# Altium PCB AAI.PcbDoc
Units mm, origin at the board's own origin, x right, y up, seen from the top; angles counter-clockwise.
Board outline 62.23 x 31.75 mm, 2 copper layers (Top Layer, Bottom Layer); 15 components, 10 nets, 33 pads, 7 vias.
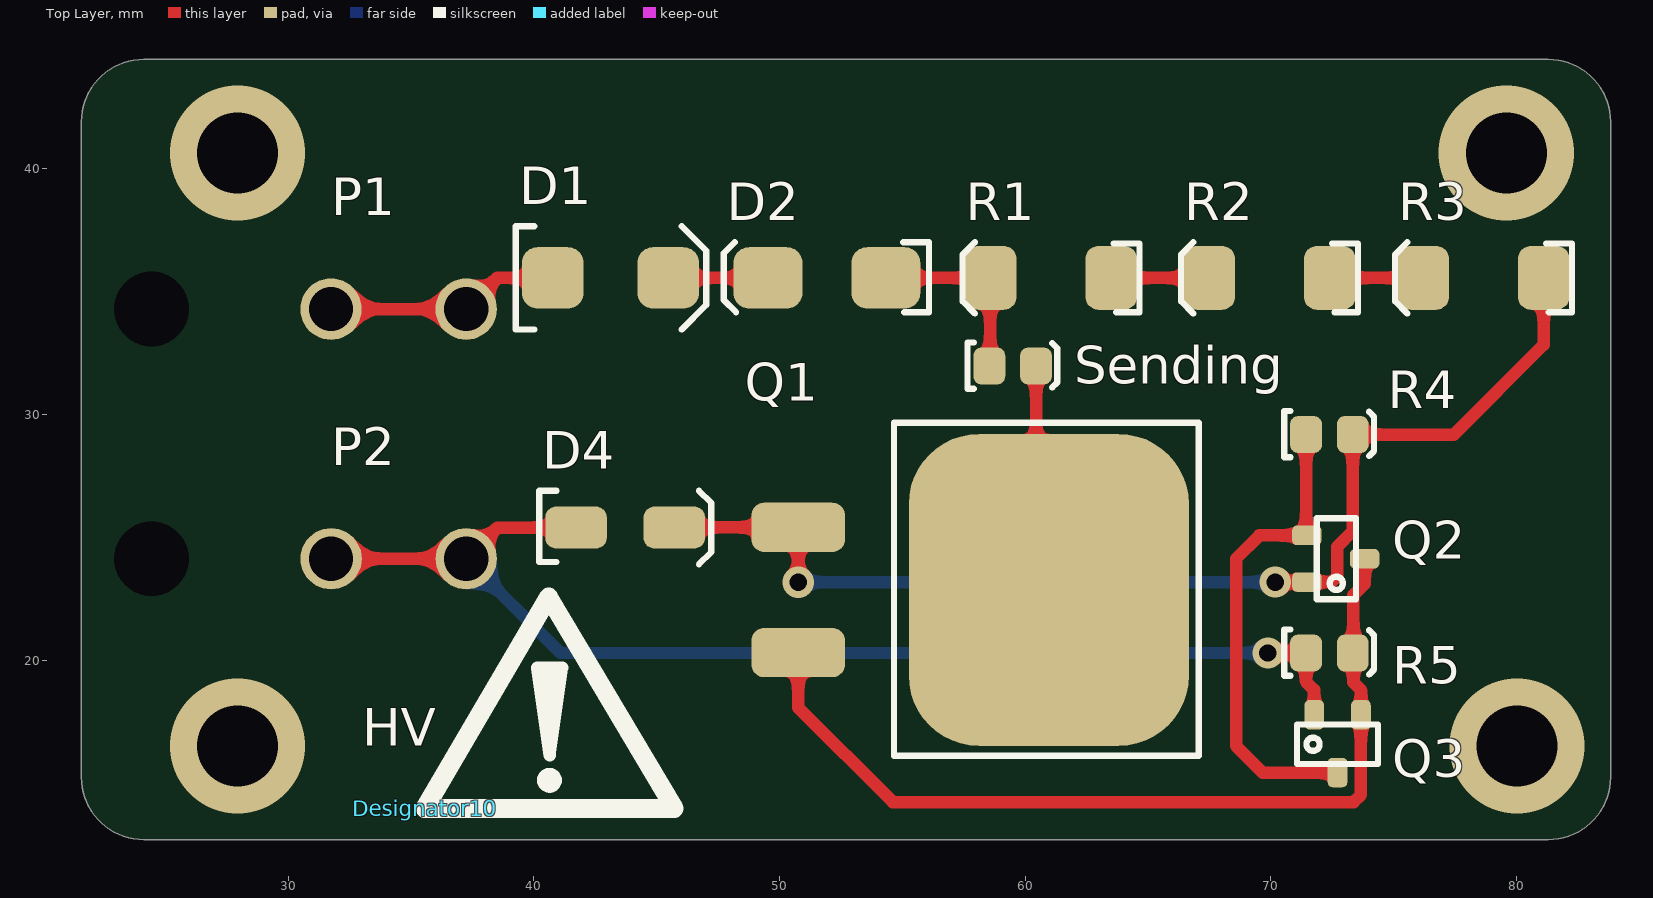
[diagram p0: Top Layer view]
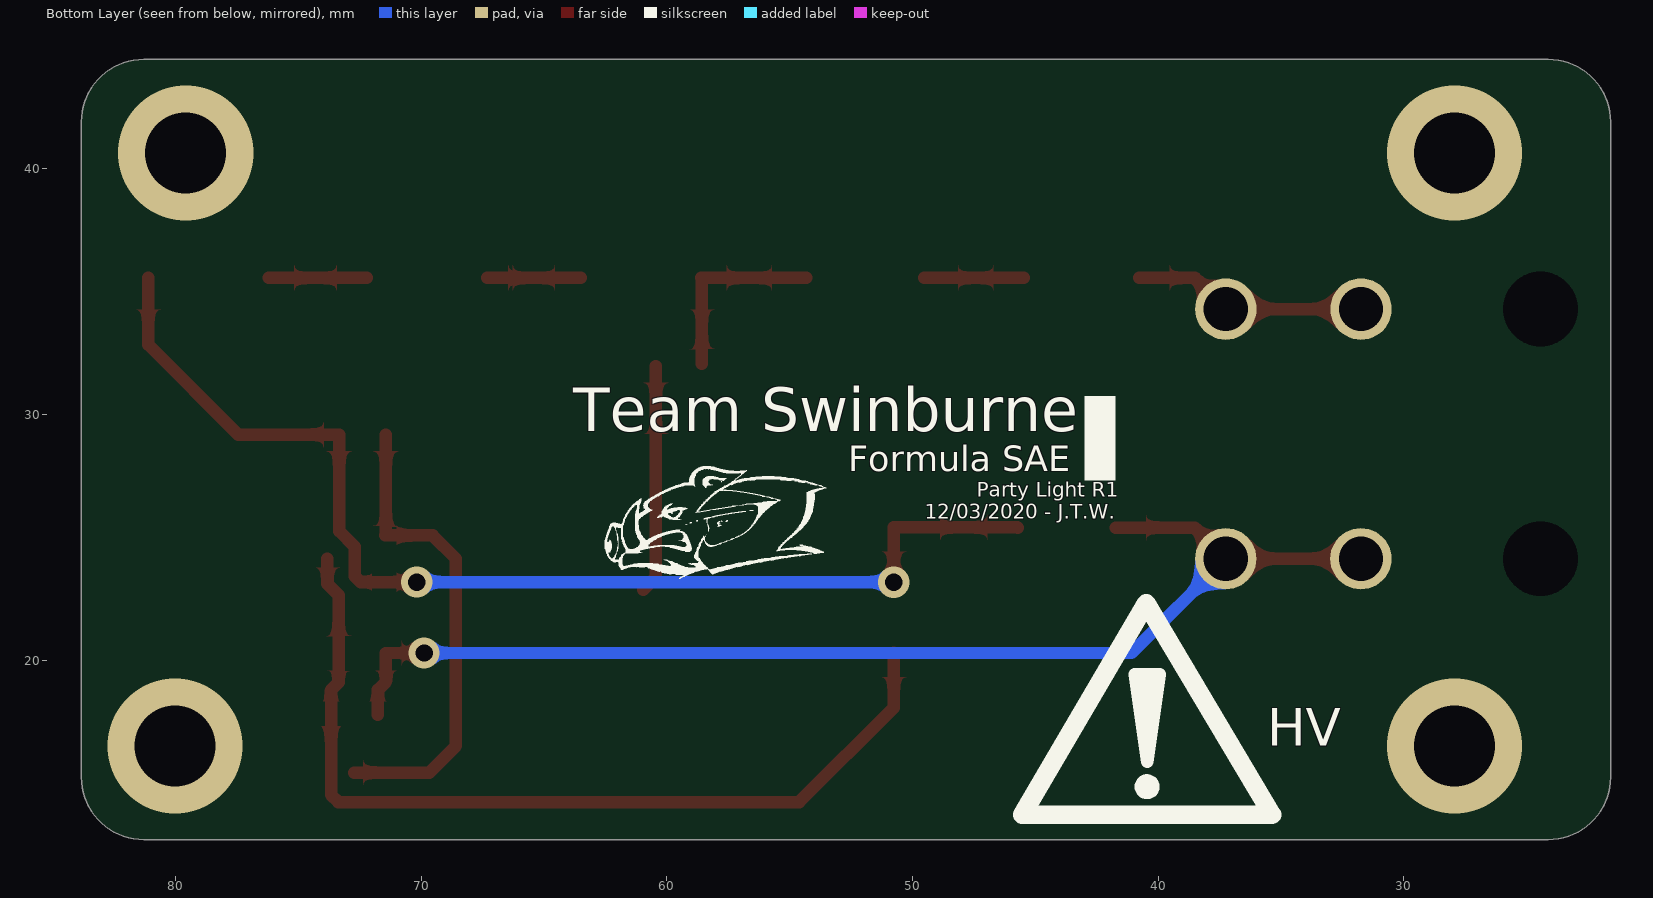
[diagram p1: Bottom Layer view, seen from below]
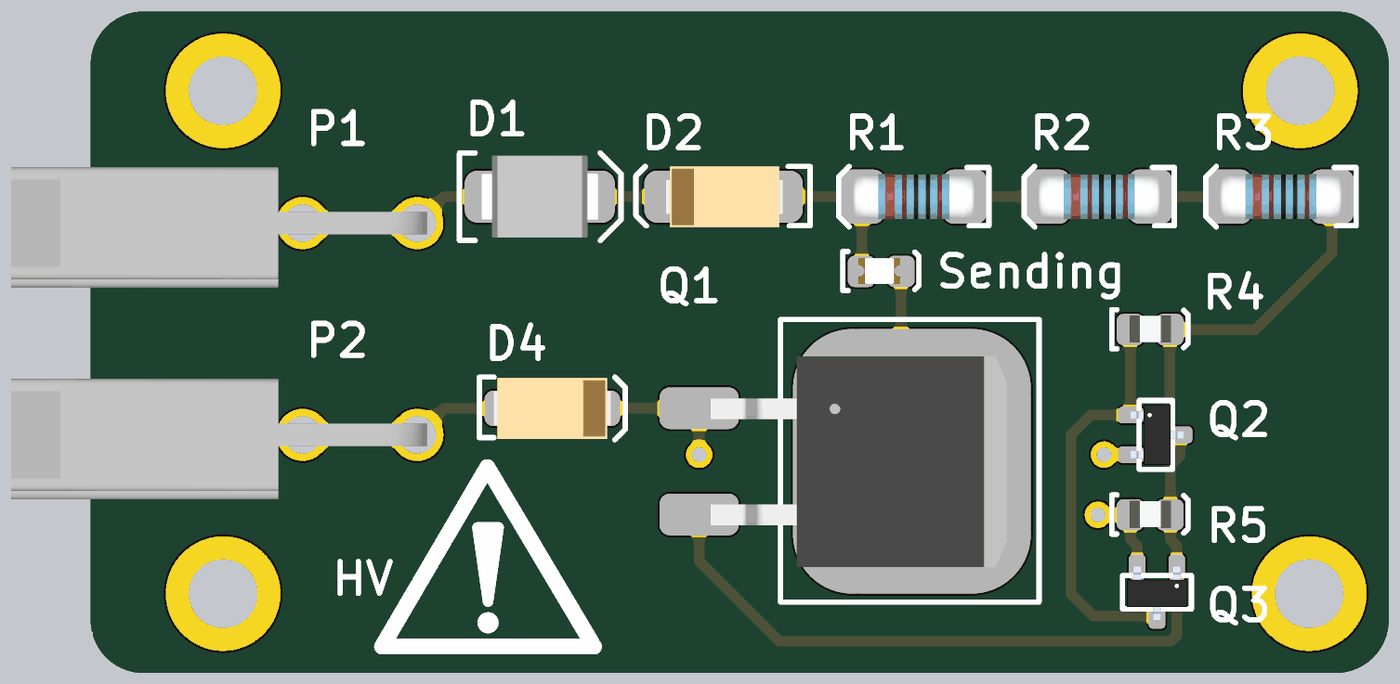
[diagram p2: 3D render of the assembled board from above, using the file's embedded part models]

## Layer stack, top to bottom
Top Solder: solder mask 0.025, SM-004, Dk 4
Top Layer: signal copper 0.0356
Dielectric 1: dielectric 0.32, FR-4, Dk 4.8
Bottom Layer: signal copper 0.0356
Bottom Solder: solder mask 0.025, SM-004, Dk 4

## Board outline
21.59,15.24 21.59,41.91 cw(c24.13,41.91) 24.13,44.45 81.28,44.45 cw(c81.28,41.91) 83.82,41.91 83.82,15.24 cw(c81.28,15.24) 81.28,12.7 24.13,12.7 cw(c24.13,15.24)

## Design rules (kind name [scope] priority, off if disabled: settings)
Clearance [All] p1: gap=0.254 ignorepadtopadclearanceinfootprint=FALSE except(0: Arc-Hole Track-Hole SMDPad-Hole THPad-Hole Via-Hole Fill-Hole Poly-Hole Region-Hole Text-Hole)
PolygonConnect [All] p1: connectstyle=Relief reliefconductorwidth=0.254 reliefentries=4 polygonreliefangle="90 Angle" airgapwidth=0.254
RoutingVias [All] p1: holewidth=0.711 width=1.27 viastyle="Through Hole" minholewidth=0.711 minwidth=1.27 maxholewidth=0.711 maxwidth=1.27
SolderMaskExpansion [All] p1: expansion=0.102 istentingtop=FALSE
Width [All] p1: maxlimit=1.27 minlimit=0.254 preferedwidth=0.635 minimp=50.000000 maximp=50.000000 favimp=50.000000
30 further rules are at their usual default settings.

## Components (designator, comment, footprint, x,y, rotation, side; value= is the part's Value field where it differs from the comment)
D1 "SD560BTR" "SMB Diode" 41.02,35.56 r0 top
D2 "1SMB5942B-13" "DI SMB Diode" 54.08,35.56 r180 top
D4 "SMAZ5V6-13-F" "DI SMA Diode" 41.72,25.4 r0 top
Designator10 "Comment" "~HV Silk" 35.56,13.97 r0 top
P1 "39301022" 39301022 37.247,34.29 r270 top
P2 "39301022" 39301022 37.25,24.13 r270 top
Q1 "R6015ENJTL" "R TO-263 N-MOSFET" 60.96,22.86 r270 top
Q2 "BC858ALT1G" "ON TO-236-3 BJT" 73.66,24.13 r90 top
Q3 "BC848ALT1G" "ON TO-236-3 BJT" 72.71,15.58 r0 top
R1 "330K" "VB 0207" 63.5,35.56 r180 top
R2 "330K" "VB 0207" 72.39,35.56 r180 top
R3 "330K" "VB 0207" 81.1,35.56 r180 top
R4 "10k" 0805 72.39,29.21 r0 top
R5 "240R" 0805 72.39,20.32 r0 top
Sending "Red" "0805 LED" 59.5,32 r0 top (schematic designator D3)

## Footprints (in the part's own frame and the unit in brackets; to place one, negate y for a bottom-side part, rotate by r counter-clockwise, add the part's x,y. Pads: shape width x height; smd on the part's side, far side on the other; paste and mask are expansions set on the pad)
0805 [mm]
  rrect50% 1.3x1.5 smd: 1(-0.962,-0.026) 2(0.938,-0.026)
  silkscreen extent -1.85,-0.95 1.8,0.93, body extent -1,-0.65 1,0.66, height 0.73
"0805 LED" [mm]
  rrect50% 1.3x1.5 smd: A(-0.962,-0.026) K(0.938,-0.026)
  silkscreen extent -1.85,-0.95 1.8,0.93, body extent -1.1,-0.62 0.9,0.62, height 1
39301022 [mm]
  round 2.5 hole 1.8: 1(0,-5.5) 2(0,0)
  round 1.524 hole 3.05: ""(0,-12.8)
  body extent -2.7,-19.47 3.1,0.47, height 11.4
"DI SMA Diode" [mm]
  rrect50% 2.5x1.7 smd: A(0,0) K(4,0)
  silkscreen extent -1.5,-1.5 5.5,1.5, body extent -0.8,-1.46 4.79,1.46, height 2.35
"DI SMB Diode" [mm]
  rrect50% 2.8x2.5 smd: A(-0.25,0) K(4.55,0)
  silkscreen extent -2,-1.45 6.35,1.4, body extent -0.69,-1.45 4.89,1.47, height 2.35
"ON TO-236-3 BJT" [mm]
  rrect50% 0.8x1.2 smd: B(0.95,2.2) C(0,-0.15) E(-0.95,2.2)
  silkscreen extent -1.65,0.2 1.65,1.8, body extent -1.45,-0.35 1.45,2.25, height 1
"R TO-263 N-MOSFET" [mm]
  rrect50% 12.7x11.4 smd: D(0,0)
  rrect50% 2x3.8 smd: G(-2.55,-10.2) S(2.55,-10.2)
  silkscreen extent -6.8,-6.3 6.75,6.1, body extent -5.03,-9.64 5.08,4.56, height 4.7
"SMB Diode" [mm]
  rrect50% 2.5x2.5 smd: A(-0.25,0) K(4.45,0)
  silkscreen extent -1.75,-2.1 6,2.1, body extent -0.69,-1.97 4.9,1.97, height 2.5
"VB 0207" [mm]
  rrect50% 2.1x2.6 smd: 1(0,0) 2(4.9,0)
  silkscreen extent -1.15,-1.45 6.05,1.45, body extent -0.45,-1.1 5.35,1.1, height 2.19
"~HV Silk" [mm] "HV Symbol Silkscreen overlay"
  silkscreen extent 0,0 10.16,8.61

## Part data
D1: "1.2V_F 600V 5A SMB", Digikey Part Number=1655-1530-2-ND, Manufacturer="SMC Diode Solutions", Digikey Link=https://www.digikey.com/product-detail/en/smc-diode-solutions/SD560BTR/1655-1530-2-ND/6022620, Part Number=SD560BTR
D2: "DIODE ZENER 51V 3W SMB", Digikey Part Number=1SMB5942B-13DICT-ND, Manufacturer="Diodes Inc", Digikey Link=https://www.digikey.com/product-detail/en/diodes-incorporated/1SMB5942B-13/1SMB5942B-13DICT-ND/5054245, Part Number=1SMB5942B-13
D4: "DIODE ZENER 5.6V 1W SMA", Digikey Part Number=SMAZ5V6-FDICT-ND, Manufacturer="Diodes Inc", Digikey Link=https://www.digikey.com/product-detail/en/diodes-incorporated/SMAZ5V6-13-F/SMAZ5V6-FDICT-ND/755500, Part Number=SMAZ5V6-13-F
P1 P2: Digikey Part Number=WM21363-ND, Angle=90, Contact=Gold, Digikey Link=https://www.digikey.com/product-detail/en/molex/0039301022/WM21363-ND/930332, Flange=No, Part Number=39301022, Pitch=4.20mm, Positions=2, Row Spacing=4.2mm
Q1: "MOSFET N-CH 600V 15A LPT", Digikey Part Number=R6015ENJTLCT-ND, Manufacturer="Rohm Semiconductor", Digikey Link=https://www.digikey.com.au/product-detail/en/rohm-semiconductor/R6015ENJTL/R6015ENJTLCT-ND/5042516, LatestRevisionDate=29-May-2009, LatestRevisionNote="IPC-7351 Footprint Added.", PackageDescription="4-Pin SOT-343 Package 1.3 mm Pitch, 2.1 mm Lead Span", PackageReference=SOT-343, PackageVersion=Sep-2000, Part Number=R6015ENJTL, Published=24-Mar-1999, Publisher="Altium Limited"
Q2: "TRANS PNP 30V 0.1A SOT-23", Digikey Part Number=BC858ALT1GOSCT-ND, Manufacturer="ON Semiconductor", Digikey Link=https://www.digikey.com.au/product-detail/en/on-semiconductor/BC858ALT1G/BC858ALT1GOSCT-ND/3462248?fbclid=IwAR0XE0JmsZu1bfxkpmh7_fMKeVVYT41RbargOB6Kv0hZlYRUvP_HzrN_yXU, Part Number=BC858ALT1G
Q3: "TRANS NPN 30V 0.1A SOT23", Digikey Part Number=BC848ALT1GOSCT-ND, Manufacturer="ON Semiconductor", Digikey Link=https://www.digikey.com/product-detail/en/on-semiconductor/BC848ALT1G/BC848ALT1GOSCT-ND/917837, Part Number=BC848ALT1G
R1 R2 R3: library part MMB02070C3303FB200, Digikey Part Number=MMB-330KBCT-ND, Manufacturer="Vishay Beyschlag", Rated Voltage=1W, Tolerance=0.01, Part Number=MMB02070C3303FB200
R4: library part RC0805FR0710KL, Manufacturer=YAGEO, Rated Voltage=0.125W, Tolerance=0.01, Material=FR-07, Part Number=RC0805FR0710KL
R5: library part RC0805FR07240RL, Manufacturer=YAGEO, Rated Voltage=0.125W, Tolerance=0.01, Material=FR-07, Part Number=RC0805FR07240RL
Sending: library part SML-210LTT86, "Red LED Indication - Discrete 1.75V 0805 (2012 Metric)", Digikey Part Number=511-1286-1-ND, Manufacturer="ROHM Semiconductor", Colour=Red, Digikey Link=https://www.digikey.com/product-detail/en/rohm-semiconductor/SML-210LTT86/511-1286-1-ND/637099, Part Number=SML-210LTT86

## Via types
v1: diameter 5.5, hole 3.3, Top Layer to Bottom Layer, 4 vias
v2: diameter 1.27, hole 0.711, Top Layer to Bottom Layer, 3 vias

## Nets (pads, with @x,y where several pads share a name; then routed paths per layer and width w, separated by ;. In a path a pad name is that pad's centre, name@x,y a point inside that pad or via, vN(x,y) a via of type N, cw(c..) or ccw(c..) an arc to the next point about the centre after c; other vN are vias at no path point)
BAT+: D1.A P1.1 P1.2 | length 9.5
  Top Layer w0.508: P1.1 P1.2 38.517,35.56 D1.A
BAT-: D4.A P2.1 P2.2 Q3.E R5.1 | length 48.9
  Top Layer w0.508: P2.1 P2.2 38.52,25.4 D4.A ; v2(69.876,20.294) R5.1 71.428,19.123 71.76,18.791 Q3.E
  Bottom Layer w0.508: P2.2 41.086,20.294 v2(69.876,20.294)
NetD1_K: D1.K D2.K | length 4.1
  Top Layer w0.508: D1.K D2.K
NetD2_A: D2.A R1.2 Sending.A | length 7.8
  Top Layer w0.508: D2.A R1.2@58.576,35.56 ; Sending.A@58.569,32.069 58.569,35.553 R1.2@58.576,35.56 ; R1.2@58.588,35.572 R1.2@58.576,35.56
NetD3_K: Q1.D Sending.K | length 9.3
  Top Layer w0.508: Sending.K 60.438,23.382 Q1.D
NetD4_K: D4.K Q1.G Q2.E R3.1 R4.2 | length 47.3
  Top Layer w0.508: D4.K 45.73,25.41 Q1.G v2(50.76,23.176) ; v2(70.17,23.18) Q2.E 72.456,23.18 72.702,23.426 72.702,24.623 73.328,25.249 R4.2 77.444,29.184 81.1,32.84 R3.1
  Bottom Layer w0.508: v2@50.764,23.18 v2(70.17,23.18)
NetQ1_S: Q1.S Q2.C Q3.B R5.2 | length 36.8
  Top Layer w0.508: Q1.S 50.76,18.074 54.61,14.224 73.362,14.224 73.66,14.522 73.66,18.796 73.354,19.102 73.354,20.294 73.354,22.647 73.81,23.103 Q2.C
NetQ2_B: Q2.B Q3.C R4.1 | length 19.6
  Top Layer w0.508: R4.1 Q2.B@71.428,25.08 ; Q2.B Q2.B@71.428,25.08 ; Q3.C 69.66,15.43 68.58,16.51 68.58,24.13 69.53,25.08 Q2.B@71.428,25.08
NetR1_1: R1.1 R2.2 | length 3.8
  Top Layer w0.508: R1.1 R2.2@67.31,35.56
NetR2_1: R2.1 R3.2 | length 4
  Top Layer w0.508: R2.1@72.21,35.56 R3.2
pads on no net: P1. P2.
copper on no net:
  other v1: 27.94,16.51 80.01,16.51 27.94,40.64 79.577,40.64

## Silkscreen, mask and mechanical layers (free items; w line width, h text height)
Bottom Overlay:
  drawing of 28 lines, arcs and shapes, not listed
  text "Team Swinburne" at 63.812,28.738 h3.05
  text "Formula SAE" at 52.607,27.341 h1.78
  text "Party Light R1" at 47.381,26.452 h1.02
  text "12/03/2020 - J.T.W." at 49.491,25.563 h1.02
  text "HV" at 35.56,16.51 h1.52

## Text inside footprints (layer, text, board x,y; h text height)
Designator10: Top Overlay "HV" at 33.02,16.51 h1.52